# Altium PCB PeterParker.PcbDoc
Units mil, origin at the board's own origin, x right, y up, seen from the top; angles counter-clockwise.
Board outline 6500 x 2700 mil, 2 copper layers (Top Layer, Bottom Layer); 68 components, 60 nets, 641 pads, 7 vias.
Unrouted connection lines stored in the file: 17.
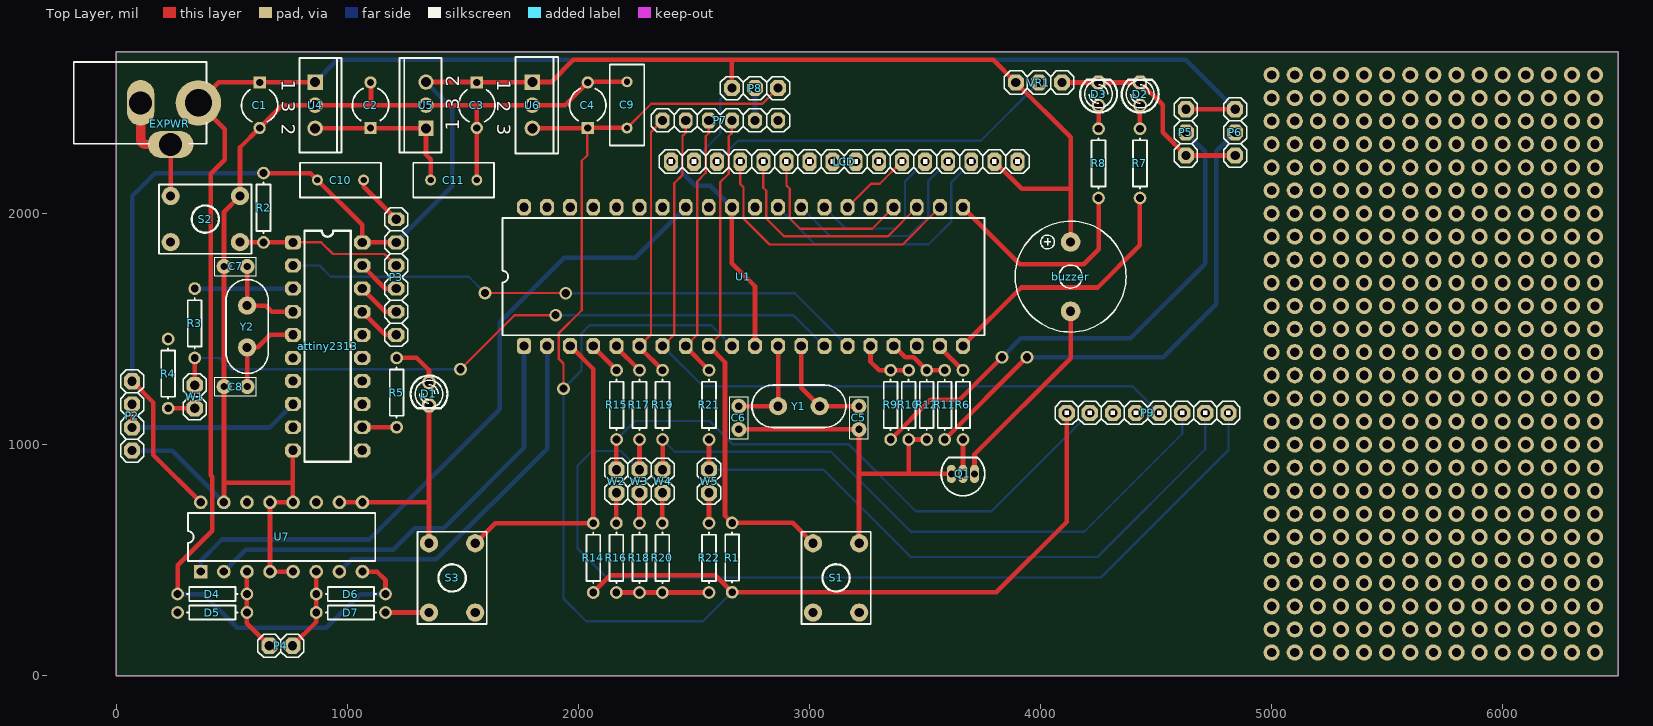
[diagram p0: Top Layer view]
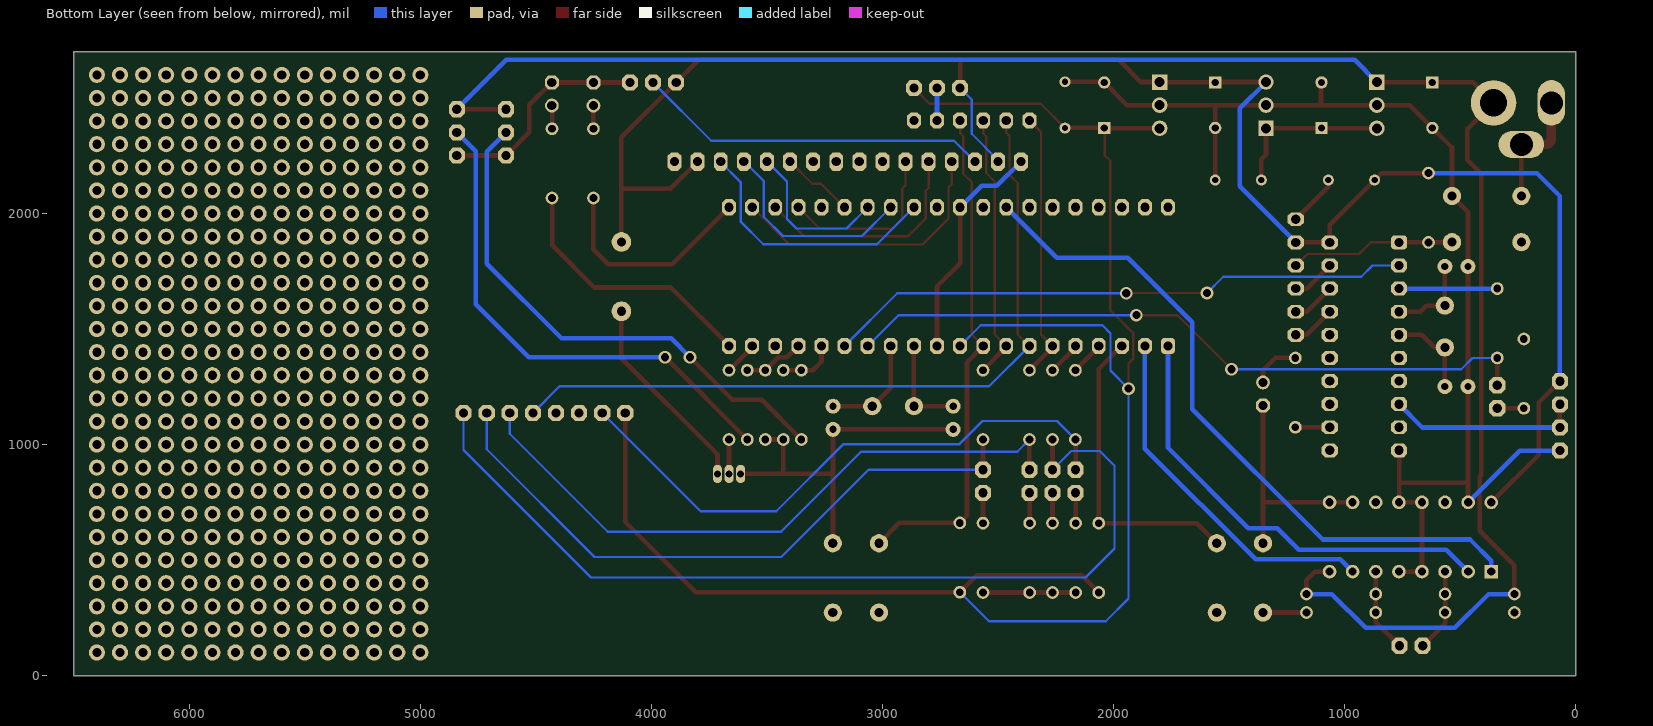
[diagram p1: Bottom Layer view, seen from below]

## Layer stack, top to bottom
Top Layer: signal copper 1.4
Dielectric: dielectric 12.6, FR-4, Dk 4.8
Bottom Layer: signal copper 1.4

## Board outline
0,0 6500,0 6500,2700 0,2700

## Design rules (kind name [scope] priority, off if disabled: settings)
Clearance [All] p1: gap=10
PolygonConnect [All] p1: connectstyle=Relief reliefconductorwidth=10 reliefentries=4 polygonreliefangle="90 Angle"
RoutingVias [All] p1: holewidth=28 width=50 viastyle="Through Hole" minholewidth=28 minwidth=50 maxholewidth=28 maxwidth=50
SilkscreenOverComponentPads [All] p1: minsilkscreentomaskgap=10
SolderMaskExpansion [All] p1: expansion=4
TestPointUsage [All] p1: valid=0 allowmultiple=FALSE
Testpoint [All] p1: side=15 testpointundercomponent=TRUE minsize=40 maxsize=100 preferedsize=60 minholesize=0 maxholesize=40 preferedholesize=32 testpointgrid=1 style=1023 order=0-112345678
Width [All] p1: maxlimit=20 minlimit=10 preferedwidth=20
23 further rules are at their usual default settings.

## Components (designator, comment, footprint, x,y, rotation, side; value= is the part's Value field where it differs from the comment)
attiny2313 "attiny2313" DIP20 914,1425 r0 top
buzzer "Header 2" buzzer 4130,1727 r90 top
C1 "Cap2" CAPR5-4X5 620,2469 r270 top
C2 "Cap2" CAPR5-4X5 1100,2469 r90 top
C3 "Cap2" CAPR5-4X5 1560,2469 r270 top
C4 "Cap2" CAPR5-4X5 2040,2469 r90 top
C5 "Cap" tinycap 3214,1116 r90 top
C6 "Cap" tinycap 2694,1116 r270 top
C7 "Cap" tinycap 516,1771 r180 top
C8 "Cap" tinycap 516,1251 r180 top
C9 "Cap" RAD-0.2 2210,2470 r90 top
C10 "Cap" RAD-0.2 970,2145 r0 top
C11 "Cap" RAD-0.2 1460,2145 r0 top
D1 "LED0" LED3MM 1353,1219 r270 top
D2 "LED0" LED3MM 4431,2517 r90 top
D3 "LED0" LED3MM 4251,2517 r90 top
D4 "Diode 1N4148" AXIAL-0.3 415,353 r180 top
D5 "Diode 1N4148" AXIAL-0.3 415,273 r0 top
D6 "Diode 1N4148" AXIAL-0.3 1015,353 r0 top
D7 "Diode 1N4148" AXIAL-0.3 1015,273 r180 top
EXPWR "PWR2.5" JACK1 230,2389 r0 top
LCD "Header 16" H1X16F 3150,2225 r0 top
P2 "Header 4" H1X04F 68,1124 r270 top
P3 "Header 6" H1X06F 1211,1725 r90 top
P4 "Header 2" H1X02F 712,129 r0 top
P5 "Header 3" H1X03F 4629,2351 r270 top
P6 "Header 3" H1X03F 4842,2351 r270 top
P7 "Header 6" H1X06F 2614,2403 r0 top
P8 "Header 3" H1X03F 2764,2543 r0 top
P9 "Header 8" H1X08F 4463,1137 r0 top
Q1 "BC547" SOT54 3664,873 r90 top
R1 "Res1" AXIAL-0.3 2665,511 r270 top
R2 "Res1" AXIAL-0.3 637,2025 r90 top
R3 "Res1" AXIAL-0.3 339,1525 r270 top
R4 "Res1" AXIAL-0.3 224,1307 r90 top
R5 "Res1" AXIAL-0.3 1213,1225 r270 top
R6 "Res1" AXIAL-0.3 3664,1172 r270 top
R7 "Res1" AXIAL-0.3 4430,2217 r90 top
R8 "Res1" AXIAL-0.3 4251,2217 r90 top
R9 "Res1" AXIAL-0.3 3351,1172 r90 top
R10 "Res1" AXIAL-0.3 3429,1172 r270 top
R11 "Res1" AXIAL-0.3 3585,1172 r90 top
R12 "Res1" AXIAL-0.3 3507,1172 r270 top
R14 "Res1" AXIAL-0.3 2064,510 r270 top
R15 "Res1" AXIAL-0.3 2165,1172 r270 top
R16 "Res1" AXIAL-0.3 2164,510 r270 top
R17 "Res1" AXIAL-0.3 2264,1172 r270 top
R18 "Res1" AXIAL-0.3 2264,510 r270 top
R19 "Res1" AXIAL-0.3 2364,1172 r270 top
R20 "Res1" AXIAL-0.3 2363,510 r270 top
R21 "Res1" AXIAL-0.3 2565,1172 r270 top
R22 "Res1" AXIAL-0.3 2565,510 r270 top
S1 "SW-PB" PB4 3115,423 r0 top
S2 "SW-PB" PB4 385,1976 r90 top
S3 "SW-PB" PB4 1453,423 r180 top
U1 "ATmega32-16PC" 40P6 2714,1727 r0 top
U4 "L7809ABV" TO220ABN 860,2469 r270 top
U5 "L7805ABV" TO220ABN 1340,2469 r90 top
U6 "LF33ABV" TO-220A 1800,2469 r270 top
U7 "L293D" DIP16 715,600 r0 top
VR1 "Res Tap" H1X03F 3993,2567 r180 top
W1 "Jumper" H1X02F 339,1207 r90 top
W2 "Jumper" H1X02F 2164,841 r90 top
W3 "Jumper" H1X02F 2264,841 r90 top
W4 "Jumper" H1X02F 2364,841 r90 top
W5 "Jumper" H1X02F 2565,841 r90 top
Y1 "XTAL" CRYSTALL 2954,1166 r180 top
Y2 "XTAL" CRYSTALL 566,1511 r90 top

## Footprints (in the part's own frame and the unit in brackets; to place one, negate y for a bottom-side part, rotate by r counter-clockwise, add the part's x,y. Pads: shape width x height; smd on the part's side, far side on the other; paste and mask are expansions set on the pad)
40P6 [mil] "DIP; 40 Leads; Row Spacing 15.24 mm; Pitch 2.54 mm"
  rrect50% 60x70 hole 40: 1(-950,-300)
  oct 60x70 hole 40: 2(-850,-300) 3(-750,-300) 4(-650,-300) 5(-550,-300) 6(-450,-300) 7(-350,-300) 8(-250,-300) 9(-150,-300) 10(-50,-300) 11(50,-300) 12(150,-300) 13(250,-300) 14(350,-300) 15(450,-300) 16(550,-300) 17(650,-300) 18(750,-300) 19(850,-300) 20(950,-300) 21(950,300) 22(850,300) 23(750,300) 24(650,300) 25(550,300) 26(450,300) 27(350,300) 28(250,300) 29(150,300) 30(50,300) 31(-50,300) 32(-150,300) 33(-250,300) 34(-350,300) 35(-450,300) 36(-550,300) 37(-650,300) 38(-750,300) 39(-850,300) 40(-950,300)
  silkscreen extent -1043,-254 1043,254
AXIAL-0.3 [mm] "Resistor; 2 Leads"
  round 1.4 hole 0.85: 1(-3.81,0) 2(3.81,0)
  silkscreen extent -2.77,-0.76 2.77,0.76
buzzer [mil]
  round 85 hole 40: 1(-150,0) 2(150,0)
  silkscreen extent -240,-240 240,240
CAPR5-4X5 [mm] "Capacitor; 2 Leads"
  rect 1.35x1.35 hole 0.8: 1(-2.5,0)
  round 1.35 hole 0.8: 2(2.5,0)
  silkscreen extent -1.69,-2 1.82,2
CRYSTALL [mm]
  round 2 hole 1: 1(-2.293,0) 2(2.293,0)
  silkscreen extent -5.16,-2.32 5.16,2.32
DIP16 [mm] "DIP; 16 Leads; Row Spacing 7.62 mm; Pitch 2.54 mm"
  rect 1.5x1.5 hole 0.9: 1(-8.89,-3.81)
  round 1.5 hole 0.9: 2(-6.35,-3.81) 3(-3.81,-3.81) 4(-1.27,-3.81) 5(1.27,-3.81) 6(3.81,-3.81) 7(6.35,-3.81) 8(8.89,-3.81) 9(8.89,3.81) 10(6.35,3.81) 11(3.81,3.81) 12(1.27,3.81) 13(-1.27,3.81) 14(-3.81,3.81) 15(-6.35,3.81) 16(-8.89,3.81)
  silkscreen extent -10.3,-2.65 10.3,2.65
DIP20 [mil]
  rrect50% 70x60 hole 40: 1(-150,450)
  oct 70x60 hole 40: 2(-150,350) 3(-150,250) 4(-150,150) 5(-150,50) 6(-150,-50) 7(-150,-150) 8(-150,-250) 9(-150,-350) 10(-150,-450) 11(150,-450) 12(150,-350) 13(150,-250) 14(150,-150) 15(150,-50) 16(150,50) 17(150,150) 18(150,250) 19(150,350) 20(150,450)
  silkscreen extent -100,-500 100,500
H1X02F [mil]
  oct 70x70 hole 40: 1(-50,0) 2(50,0)
  silkscreen extent -100,-50 100,50
H1X03F [mil]
  oct 70x70 hole 40: 1(-100,0) 2(0,0) 3(100,0)
  silkscreen extent -150,-50 150,50
H1X04F [mil]
  oct 70x70 hole 40: 1(-150,0) 2(-50,0) 3(50,0) 4(150,0)
  silkscreen extent -200,-50 200,50
H1X06F [mil]
  oct 60x70 hole 40: 1(-250,0) 2(-150,0) 3(-50,0) 4(50,0) 5(150,0) 6(250,0)
  silkscreen extent -300,-50 300,50
H1X08F [mil]
  oct 70x70 hole 40: 1(-350,0) 2(-250,0) 3(-150,0) 4(-50,0) 5(50,0) 6(150,0) 7(250,0) 8(350,0)
  silkscreen extent -400,-50 400,50
H1X16F [mil]
  oct 60x80 hole 40: 1(-750,0) 2(-650,0) 3(-550,0) 4(-450,0) 5(-350,0) 6(-250,0) 7(-150,0) 8(-50,0) 9(50,0) 10(150,0) 11(250,0) 12(350,0) 13(450,0) 14(550,0) 15(650,0) 16(750,0)
  silkscreen extent -800,-50 800,50
JACK1 [mm]
  round 5 hole 3: 1(3.175,2.286)
  oval 3x5 hole 2.54: 2(-3.175,2.286)
  oval 5x3 hole 2.54: 3(0.127,-2.286)
  silkscreen extent -10.52,-2.21 4.07,6.79
LED3MM [mil]
  round 60 hole 40: 1(-50,0)
  oct 60x60 hole 40: 2(50,0)
  silkscreen extent -80,-80 62,80
PB4 [mm]
  round 2 hole 1: 1(2.54,-3.81) 1(2.54,3.81) 2(-2.54,-3.81) 2(-2.54,3.81)
  silkscreen extent -3.81,-5.08 3.81,5.08
RAD-0.2 [mm] "Jumper Wire; 2 Leads"
  round 1.2 hole 0.7: 1(-2.54,0) 2(2.54,0)
  silkscreen extent -4.44,-1.91 4.44,1.91
SOT54 [mm] "TO, Flat Index; 3 In-Line, Axial Leads; Body Dia. 4.6mm; Leads 0.48 x 0.45 mm (max)"
  oval 2x1 hole 0.8: 1(0,1.27) 2(0,0) 3(0,-1.27)
  silkscreen extent -2.4,-2.4 1.8,2.4
tinycap [mil]
  round 65 hole 31.5: 1(-50,0) 2(50,0)
  silkscreen extent -90,-40 90,40
TO220ABN [mm] "TO, Thru-Hole, Vertical, Heatsink Mounted; 3 In-Line Leads; Pitch 2.54 mm; Pin sequence 1, 3, 2"
  rect 1.7x1.7 hole 1.1: 1(-2.54,0)
  round 1.7 hole 1.1: 2(2.54,0) 3(0,0)
  silkscreen extent -5.2,-1.7 5.2,2.9
TO-220A [mm] "TO, Thru-Hole, Vertical, Heatsink Mounted; 3 In-Line Leads; Pitch 2.54 mm"
  rect 1.7x1.7 hole 1.1: 1(-2.54,0)
  round 1.7 hole 1.1: 2(0,0) 3(2.54,0)
  silkscreen extent -5.3,-1.85 5.3,2.85

## Part data
buzzer P4: "Header, 2-Pin"
C1 C2 C3 C4 C5 C6 C7 C8 C9 C10 C11: "Capacitor"
D1 D2 D3: "Typical INFRARED GaAs LED"
D4 D5 D6 D7: "High Conductance Fast Diode"
EXPWR: "Low Voltage Power Supply Connector"
LCD: "Header, 16-Pin"
P2: "Header, 4-Pin"
P3 P7: "Header, 6-Pin"
P5 P6 P8: "Header, 3-Pin"
P9: "Header, 8-Pin"
Q1: "NPN General-purpose Transistor"
R1 R2 R3 R4 R5 R6 R7 R8 R9 R10 R11 R12 R14 R15 R16 R17 R18 R19 R20 R21 R22: "Resistor"
S1 S2 S3: "Switch"
U1: "8-Bit AVR Microcontroller with 32K Bytes of In-System Programmable Flash Memory"
U4 U5: "Precision 1A Regulator"
U6: "500mA, Very Low Drop (0.45V) Voltage Regulator"
U7: "Push-Pull Four Channel Driver With Diode"
VR1: "Tapped Resistor"
W1 W2 W3 W4 W5: "Jumper Wire"
Y1 Y2: "Crystal Oscillator"

## Free pads (board coordinates)
  round 70 hole 40: 0(5000,100) 0(5000,200) 0(5000,300) 0(5000,400) 0(5000,500) 0(5000,600) 0(5000,700) 0(5000,800) 0(5000,900) 0(5000,1000) 0(5000,1100) 0(5000,1200) 0(5000,1300) 0(5000,1400) 0(5000,1500) 0(5000,1600) 0(5000,1700) 0(5000,1800) 0(5000,1900) 0(5000,2000) 0(5000,2100) 0(5000,2200) 0(5000,2300) 0(5000,2400) 0(5000,2500) 0(5000,2600) 0(5100,100) 0(5100,200) 0(5100,300) 0(5100,400) 0(5100,500) 0(5100,600) 0(5100,700) 0(5100,800) 0(5100,900) 0(5100,1000) 0(5100,1100) 0(5100,1200) 0(5100,1300) 0(5100,1400) 0(5100,1500) 0(5100,1600) 0(5100,1700) 0(5100,1800) 0(5100,1900) 0(5100,2000) 0(5100,2100) 0(5100,2200) 0(5100,2300) 0(5100,2400) 0(5100,2500) 0(5100,2600) 0(5200,100) 0(5200,200) 0(5200,300) 0(5200,400) 0(5200,500) 0(5200,600) 0(5200,700) 0(5200,800) 0(5200,900) 0(5200,1000) 0(5200,1100) 0(5200,1200) 0(5200,1300) 0(5200,1400) 0(5200,1500) 0(5200,1600) 0(5200,1700) 0(5200,1800) 0(5200,1900) 0(5200,2000) 0(5200,2100) 0(5200,2200) 0(5200,2300) 0(5200,2400) 0(5200,2500) 0(5200,2600) 0(5300,100) 0(5300,200) 0(5300,300) 0(5300,400) 0(5300,500) 0(5300,600) 0(5300,700) 0(5300,800) 0(5300,900) 0(5300,1000) 0(5300,1100) 0(5300,1200) 0(5300,1300) 0(5300,1400) 0(5300,1500) 0(5300,1600) 0(5300,1700) 0(5300,1800) 0(5300,1900) 0(5300,2000) 0(5300,2100) 0(5300,2200) 0(5300,2300) 0(5300,2400) 0(5300,2500) 0(5300,2600) 0(5400,100) 0(5400,200) 0(5400,300) 0(5400,400) 0(5400,500) 0(5400,600) 0(5400,700) 0(5400,800) 0(5400,900) 0(5400,1000) 0(5400,1100) 0(5400,1200) 0(5400,1300) 0(5400,1400) 0(5400,1500) 0(5400,1600) 0(5400,1700) 0(5400,1800) 0(5400,1900) 0(5400,2000) 0(5400,2100) 0(5400,2200) 0(5400,2300) 0(5400,2400) 0(5400,2500) 0(5400,2600) 0(5500,100) 0(5500,200) 0(5500,300) 0(5500,400) 0(5500,500) 0(5500,600) 0(5500,700) 0(5500,800) 0(5500,900) 0(5500,1000) 0(5500,1100) 0(5500,1200) 0(5500,1300) 0(5500,1400) 0(5500,1500) 0(5500,1600) 0(5500,1700) 0(5500,1800) 0(5500,1900) 0(5500,2000) 0(5500,2100) 0(5500,2200) 0(5500,2300) 0(5500,2400) 0(5500,2500) 0(5500,2600) 0(5600,100) 0(5600,200) 0(5600,300) 0(5600,400) 0(5600,500) 0(5600,600) 0(5600,700) 0(5600,800) 0(5600,900) 0(5600,1000) 0(5600,1100) 0(5600,1200) 0(5600,1300) 0(5600,1400) 0(5600,1500) 0(5600,1600) 0(5600,1700) 0(5600,1800) 0(5600,1900) 0(5600,2000) 0(5600,2100) 0(5600,2200) 0(5600,2300) 0(5600,2400) 0(5600,2500) 0(5600,2600) 0(5700,100) 0(5700,200) 0(5700,300) 0(5700,400) 0(5700,500) 0(5700,600) 0(5700,700) 0(5700,800) 0(5700,900) 0(5700,1000) 0(5700,1100) 0(5700,1200) 0(5700,1300) 0(5700,1400) 0(5700,1500) 0(5700,1600) 0(5700,1700) 0(5700,1800) 0(5700,1900) 0(5700,2000) 0(5700,2100) 0(5700,2200) 0(5700,2300) 0(5700,2400) 0(5700,2500) 0(5700,2600) 0(5800,100) 0(5800,200) 0(5800,300) 0(5800,400) 0(5800,500) 0(5800,600) 0(5800,700) 0(5800,800) 0(5800,900) 0(5800,1000) 0(5800,1100) 0(5800,1200) 0(5800,1300) 0(5800,1400) 0(5800,1500) 0(5800,1600) 0(5800,1700) 0(5800,1800) 0(5800,1900) 0(5800,2000) 0(5800,2100) 0(5800,2200) 0(5800,2300) 0(5800,2400) 0(5800,2500) 0(5800,2600) 0(5900,100) 0(5900,200) 0(5900,300) 0(5900,400) 0(5900,500) 0(5900,600) 0(5900,700) 0(5900,800) 0(5900,900) 0(5900,1000) 0(5900,1100) 0(5900,1200) 0(5900,1300) 0(5900,1400) 0(5900,1500) 0(5900,1600) 0(5900,1700) 0(5900,1800) 0(5900,1900) 0(5900,2000) 0(5900,2100) 0(5900,2200) 0(5900,2300) 0(5900,2400) 0(5900,2500) 0(5900,2600) 0(6000,100) 0(6000,200) 0(6000,300) 0(6000,400) 0(6000,500) 0(6000,600) 0(6000,700) 0(6000,800) 0(6000,900) 0(6000,1000) 0(6000,1100) 0(6000,1200) 0(6000,1300) 0(6000,1400) 0(6000,1500) 0(6000,1600) 0(6000,1700) 0(6000,1800) 0(6000,1900) 0(6000,2000) 0(6000,2100) 0(6000,2200) 0(6000,2300) 0(6000,2400) 0(6000,2500) 0(6000,2600) 0(6100,100) 0(6100,200) 0(6100,300) 0(6100,400) 0(6100,500) 0(6100,600) 0(6100,700) 0(6100,800) 0(6100,900) 0(6100,1000) 0(6100,1100) 0(6100,1200) 0(6100,1300) 0(6100,1400) 0(6100,1500) 0(6100,1600) 0(6100,1700) 0(6100,1800) 0(6100,1900) 0(6100,2000) 0(6100,2100) 0(6100,2200) 0(6100,2300) 0(6100,2400) 0(6100,2500) 0(6100,2600) 0(6200,100) 0(6200,200) 0(6200,300) 0(6200,400) 0(6200,500) 0(6200,600) 0(6200,700) 0(6200,800) 0(6200,900) 0(6200,1000) 0(6200,1100) 0(6200,1200) 0(6200,1300) 0(6200,1400) 0(6200,1500) 0(6200,1600) 0(6200,1700) 0(6200,1800) 0(6200,1900) 0(6200,2000) 0(6200,2100) 0(6200,2200) 0(6200,2300) 0(6200,2400) 0(6200,2500) 0(6200,2600) 0(6300,100) 0(6300,200) 0(6300,300) 0(6300,400) 0(6300,500) 0(6300,600) 0(6300,700) 0(6300,800) 0(6300,900) 0(6300,1000) 0(6300,1100) 0(6300,1200) 0(6300,1300) 0(6300,1400) 0(6300,1500) 0(6300,1600) 0(6300,1700) 0(6300,1800) 0(6300,1900) 0(6300,2000) 0(6300,2100) 0(6300,2200) 0(6300,2300) 0(6300,2400) 0(6300,2500) 0(6300,2600) 0(6400,100) 0(6400,200) 0(6400,300) 0(6400,400) 0(6400,500) 0(6400,600) 0(6400,700) 0(6400,800) 0(6400,900) 0(6400,1000) 0(6400,1100) 0(6400,1200) 0(6400,1300) 0(6400,1400) 0(6400,1500) 0(6400,1600) 0(6400,1700) 0(6400,1800) 0(6400,1900) 0(6400,2000) 0(6400,2100) 0(6400,2200) 0(6400,2300) 0(6400,2400) 0(6400,2500) 0(6400,2600)

## Via types
v1: diameter 55, hole 35, Top Layer to Bottom Layer, 7 vias

## Nets (pads, with @x,y where several pads share a name; then routed paths per layer and width w, separated by ;. In a path a pad name is that pad's centre, name@x,y a point inside that pad or via, vN(x,y) a via of type N, cw(c..) or ccw(c..) an arc to the next point about the centre after c; other vN are vias at no path point)
3.3: C4.1 C9.1 P8.3 P9.1 R1.2 R14.2 U1.10 U6.3 | length 7733.4
  Top Layer w10: v1(1935,1242) 1935,1351 1914,1372 1914,1481 2014,1581 2014,2228 2038.42,2252.42 C4.1@2038.42,2369 ; C9.1 2315,2475 2796,2475 P8.3
  Top Layer w20: U6.3 C4.1@2038.42,2369 ; C4.1 C9.1@2209.43,2370.57 ; R14.2 2138,434 2592,434 R1.2 3809,361 4113,665 P9.1
  Bottom Layer w10: U1.10 2575,1516 2048,1516 2013,1481 2013,1320 v1(1935,1242) 1935,334 2034,235 2539,235 R1.2
4: LCD.4 U1.22 | length 1215.3
  Top Layer w10: LCD.4 2700,2128 2714,2114 2714,1979 2827,1866 3403,1866 U1.22
5: attiny2313.20 buzzer.2 C3.1 C10.1 LCD.2 LCD.15 P2.1 P3.5 P8.1 R2.2 U5.2 U6.1 U7.16 VR1.3 | length 7947.3
  Top Layer w20: P2.1 160,1182 160,955 U7.16 ; R2.2 840,2175 C10.1 1064,1951 attiny2313.20 P3.5 ; U5.2 1558.43,2569 C3.1 U6.1@1798.43,2567.43 ; U6.1 1882,2569 1978,2665 2664,2665 3795,2665 VR1.3 4128,2332 ; P8.1 2664,2664 ; LCD.15 3918,2107 4130,2107 ; buzzer.2 4130,2107 ; 4130,2330 4130,2107
  Bottom Layer w10: LCD.2 2500,2231 2614,2345 2614,2493 P8.1
  Bottom Layer w20: P2.1 68,2076 167,2175 R2.2 ; P3.5 1454,2118 1454,2455 U5.2
5': LCD.5 U1.23 | length 986.1
  Top Layer w10: LCD.5 2800,2112 2813,2099 2813,1979 2890,1902 3339,1902 U1.23
6: LCD.6 U1.24 | length 758.4
  Top Layer w10: LCD.6 2900,2121 2914,2107 2914,1980 2960,1934 3271,1934 U1.24
9: C2.1 C11.1 U4.2 U5.1 | length 713.6
  Top Layer w20: U4.2 1098.42,2369 C2.1 1101.57,2369 U5.1 1340,2254 1360,2234 C11.1
11: LCD.11 U1.26 | length 318
  Top Layer w10: U1.26 3266,2129 3304,2129 LCD.11
12: C1.1 D4.2 D6.2 EXPWR.1 P5.1 P6.1 U4.1 U7.8 | length 8330.9
  Top Layer w20: D4.2 265,478 414.53,627.53 414.53,860.47 408,867 408,2172 469,2233 469,2365 EXPWR.1 443.43,2567.43 C1.1 U4.1@858.43,2567.43 ; U7.8 1128,450 1165,413 D6.2 ; P5.1 P6.1@4850,2451
  Bottom Layer w20: D4.2 377,353 523,207 909,207 1055,353 D6.2 ; U4.1 956,2665 4628,2665 P6.1
12': LCD.12 U1.27 | length 689.1
  Bottom Layer w10: U1.27 3156,1935 3372,1935 3413,1976 3413,2138 LCD.12
13: LCD.13 U1.28 | length 909.5
  Bottom Layer w10: U1.28 3088,1903 3431,1903 3514,1986 3514,2141 LCD.13@3598,2225
14: LCD.14 U1.29 | length 1149.5
  Bottom Layer w10: U1.29 3024,1867 3516,1867 3614,1965 3614,2136 LCD.14@3700,2222
EN1: U1.33 U7.1 | length 3000
  Bottom Layer w20: U7.1 365,497 457,589 1095,589 1659,1153 1659,1529 1939,1809 2246,1809 U1.33
GND: attiny2313.10 C1.2 C2.2 C3.2 C4.2 C5.1 C6.2 C7.2 C8.2 C9.2 C10.2 C11.2 D1.2 D2.2 D3.2 D5.1 D7.1 EXPWR.2 EXPWR.3 LCD.1 LCD.16 P2.4 P3.6 P5.3 P6.3 P7.6 P9.3 Q1.1 R4.2 R10.2 R12.2 R16.2 R18.2 R20.2 R22.2 S1.1 S2.1 S3.1 U1.11 U1.31 U4.3 U5.3 U6.2 U7.4 U7.5 U7.9 U7.10 U7.12 U7.13 U7.15 VR1.1 | length 11189.8
  Top Layer w20: S2.1@235,2076 EXPWR.3 ; U7.15@466,751 466,835 ; 762,835 466,835 ; U7.12@764,751 attiny2313.10 ; U7.5 U7.4 U7.13 U7.12 ; U7.10 U7.9 1352,750 ; C10.2 1070,2116 P3.6 ; C2.2 1102,2565.43 1102,2469 ; D7.1 S3.1@1353,273 ; S3.1@1353,573 D1.2 ; C11.2 C3.2 1560,2468 ; R16.2 R18.2 R20.2 R22.2 ; C9.2 2042.57,2570 C4.2 1941.57,2469 U6.2 U5.3 1102,2469 ; U1.31 2664,1785 2764,1685 U1.11 ; C6.2 C5.1 S1.1@3214,574 ; 3216,873 Q1.1 ; 3429,875 R10.2 R12.2 ; VR1.1 D3.2 D2.2 4528,2470 4528,2352 P5.3 P6.3 P6.3@4850,2251 ; 466,835 C8.2 C7.2 466,2007 535,2076 535,2285.57 C1.2 718.42,2469 U4.3 1102,2469
  Top Layer w40: EXPWR.2 105,2321 ccw(c126,2321) 126,2300 ; 127,2299 EXPWR.3
  Bottom Layer w20: P2.4 241,974 U7.15 ; LCD.1 2505,2120 2571,2120 U1.31
IN1: U1.1 U7.2 | length 1965
  Bottom Layer w20: U7.2@468,450 U7.2 560,545 1198,545 1291,638 1416,638 1764,986 U1.1
IN2: U1.2 U7.7 | length 1564.4
  Bottom Layer w20: U7.7 1018,503 1385,503 1864,982 U1.2
INPUT1: P5.2 R9.1 | length 2278.6
  Top Layer w20: R9.1 3523,1194 3649,1194 v1(3833,1378)
  Bottom Layer w20: v1(3833,1378) 3915,1460 4389,1460 4712,1783 4712,2268 P5.2
INPUT2: P6.2 R11.1 | length 2195.3
  Top Layer w20: R11.1 v1(3941,1378)
  Bottom Layer w20: v1(3941,1378) 4531,1378 4761,1608 4761,2270 P6.2
MISO: P7.2 P9.5 U1.7 | length 3286.5
  Top Layer w10: U1.7 2414,1477 2414,2131 2450,2167 2450,2336 2464,2350 P7.2
  Bottom Layer w10: U1.7 2539,1252 4398,1252 P9.5
MOSI: P9.6 R19.2 W4.2 | length 2810.9
  Top Layer w20: W4.2 R19.2
  Bottom Layer w10: R19.2 2417,969 3093,969 3439,623 4189,623 4613,1047 P9.6
Netattiny2313_1: attiny2313.1 P3.4 R2.1 S2.2 | length 716.4
  Top Layer w10: attiny2313.1 887,1875 937,1825 1161,1825 P3.4
  Top Layer w20: S2.2@535,1876 R2.1@636,1876 ; R2.1 attiny2313.1
Netattiny2313_3: attiny2313.3 R3.1 | length 425
  Bottom Layer w20: R3.1 attiny2313.3
Netattiny2313_4: attiny2313.4 C7.1 Y2.2 | length 378.6
  Top Layer w20: C7.1 Y2.2 646.72,1601.28 673,1575 attiny2313.4
Netattiny2313_5: attiny2313.5 C8.1 Y2.1 | length 390.2
  Top Layer w20: C8.1 Y2.1 611.72,1420.72 666,1475 attiny2313.5
Netattiny2313_12: attiny2313.12 R5.2 | length 149
  Top Layer w20: attiny2313.12 R5.2
Netattiny2313_17: attiny2313.17 P3.1 | length 188.4
  Top Layer w20: attiny2313.17 1164,1475 P3.1
Netattiny2313_18: attiny2313.18 P3.2 | length 188.4
  Top Layer w20: attiny2313.18 1164,1575 P3.2
Netattiny2313_19: attiny2313.19 P3.3 | length 188.4
  Top Layer w20: attiny2313.19 1164,1675 P3.3
Netbuzzer_1: buzzer.1 Q1.3 | length 876.3
  Top Layer w20: Q1.3 3714,958 4130,1374 buzzer.1
NetC5_2: C5.2 U1.13 Y1.1 | length 464
  Top Layer w20: U1.13 2964,1246.28 Y1.1 C5.2
NetC6_1: C6.1 U1.12 Y1.2 | length 430.8
  Top Layer w20: C6.1 Y1.2 2864,1166.28 U1.12
NetD1_1: D1.1 R5.1 | length 214.4
  Top Layer w20: R5.1 1299,1375 1353,1321 D1.1
NetD2_1: D2.1 R7.2 | length 99
  Top Layer w20: R7.2 D2.1@4430,2466
NetD3_1: D3.1 R8.2 | length 100
  Top Layer w20: R8.2 D3.1
NetD4_1: D4.1 D5.2 P4.1 U7.3 | length 361.2
  Top Layer w20: U7.3 D4.1 D5.2 565,226 P4.1
NetD6_1: D6.1 D7.2 P4.2 U7.6 | length 363.7
  Top Layer w20: P4.2 865,232 D7.2 D6.1 U7.6
NetLCD_3: LCD.3 VR1.2 | length 1534.7
  Bottom Layer w10: LCD.3 2690,2315 3741,2315 VR1.2
NetP7_5: P7.5 P8.2 | length 140
  Bottom Layer w20: P7.5 P8.2
NetQ1_2: Q1.2 R6.2 | length 149
  Top Layer w20: Q1.2 R6.2
NetR4_1: R4.1 W1.1 | length 115
  Top Layer w20: R4.1 W1.1
NetR6_1: R6.1 U1.19 | length 141.4
  Top Layer w20: U1.19@3564,1422 R6.1
NetR7_1: R7.1 U1.20 | length 1150.6
  Top Layer w20: U1.20 3917,1680 4247,1680 4430,1863 R7.1
NetR8_1: R8.1 U1.21 | length 936.8
  Top Layer w20: U1.21 3910,1781 4186,1781 4251,1846 R8.1
NetR9_2: R9.2 R10.1 U1.16 | length 248.3
  Top Layer w20: U1.16 3264,1359 3301,1322 R9.2 R10.1
NetR11_2: R11.2 R12.1 U1.17 | length 264.5
  Top Layer w20: U1.17 3413.53,1377.47 3451.53,1377.47 R12.1 R11.2
NetR16_1: R16.1 W2.1 | length 131
  Top Layer w20: R16.1 W2.1
NetR18_1: R18.1 W3.1 | length 131
  Top Layer w20: R18.1 W3.1
NetR20_1: R20.1 W4.1 | length 130
  Top Layer w20: R20.1 W4.1@2363,790
NetR22_1: R22.1 W5.1 | length 131
  Top Layer w20: R22.1 W5.1
PB2: R14.1 S3.2 U1.3 | length 1355.5
  Top Layer w20: S3.2@1553,573 1640,660 R14.1 2064,1327 U1.3
PB3: R15.1 U1.4 | length 142.8
  Top Layer w20: U1.4@2064,1423 R15.1
PB4: R17.1 U1.5 | length 141.4
  Top Layer w20: U1.5@2164,1422 R17.1
PB5: P7.1 R19.1 U1.6 | length 1158.8
  Top Layer w10: U1.6 2314,1477 2314,2353 P7.1
  Top Layer w20: U1.6@2264,1422 R19.1
PB7: P7.3 R21.1 U1.8 | length 1160.3
  Top Layer w10: U1.8 2514,1477 2514,2139 2551,2176 2551,2334 2564,2347 P7.3
  Top Layer w20: U1.8@2464,1423 R21.1
RESET: P9.2 R15.2 W2.2 | length 2549.5
  Top Layer w20: W2.2 R15.2@2164,1021
  Bottom Layer w10: R15.2 2245,1102 2567,1102 2667,1002 3169,1002 3460,711 3787,711 P9.2
RFIN: attiny2313.8 P2.2 P2.3 | length 837.8
  Top Layer w20: P2.3 P2.2
  Bottom Layer w20: P2.3 663,1074 attiny2313.8
RST: P7.4 R1.1 S1.2 U1.9 | length 2211.7
  Top Layer w10: U1.9 2614,1477 2614,2136 2650,2172 2650,2334 2664,2348 P7.4
  Top Layer w20: U1.9 2634,1357 2634,692 R1.1 2927,661 S1.2@3015,573
RX: attiny2313.2 U1.15 | length 2544.1
  Top Layer w10: v1(1595,1656) 1944,1656 v1(1945,1655)
  Bottom Layer w10: attiny2313.2 879,1775 928,1726 1525,1726 v1(1595,1656) ; v1(1945,1655) 2936,1655 U1.15
SCK: P9.7 R21.2 W5.2 | length 2786
  Top Layer w20: W5.2 R21.2
  Bottom Layer w10: W5.2 3060,891 3438,513 4246,513 4713,980 P9.7
SS: P9.8 R17.2 W3.2 | length 4074.5
  Top Layer w20: W3.2 R17.2
  Bottom Layer w10: W3.2 2183,972 2060,972 1996,908 1996,550 2121,425 4261,425 4813,977 P9.8
TX: R3.2 U1.14 W1.2 | length 3015.3
  Top Layer w10: v1(1489,1326) 1723,1560 v1(1901,1560)
  Top Layer w20: W1.2 R3.2
  Bottom Layer w10: R3.2 446,1375 495,1326 v1(1489,1326) ; v1(1901,1560) 2931,1560 U1.14
pads on no net: attiny2313.6 attiny2313.7 attiny2313.9 attiny2313.11 attiny2313.13 attiny2313.14 attiny2313.15 attiny2313.16 LCD.7 LCD.8 LCD.9 LCD.10 P9.4 U1.18 U1.25 U1.30 U1.32 U1.34 U1.35 U1.36 U1.37 U1.38 U1.39 U1.40 U7.11 U7.14

## Keep-outs
Keep-Out Layer:
  the board outline again, w5

## Text inside footprints (layer, text, board x,y; h text height)
U4: Top Overlay "1" at 715.31,2578.84 h59.06 r270; Top Overlay "2" at 715.32,2388.68 h59.06 r270; Top Overlay "3" at 715.32,2488.69 h59.06 r270
U5: Top Overlay "1" at 1484.69,2359.16 h59.06 r90; Top Overlay "2" at 1484.68,2549.32 h59.06 r90; Top Overlay "3" at 1484.68,2449.31 h59.06 r90
U6: Top Overlay "3" at 1649.41,2388.68 h59.06 r270; Top Overlay "2" at 1649.41,2488.69 h59.06 r270; Top Overlay "1" at 1649.41,2578.84 h59.06 r270